# Altium PCB PCB1.PcbDoc
Units mm, origin at the board's own origin, x right, y up, seen from the top; angles counter-clockwise.
Board outline 85.78 x 46.61 mm, 2 copper layers (Top Layer, Bottom Layer); 29 components, 13 nets, 66 pads, 0 vias.
Unrouted connection lines stored in the file: 2.
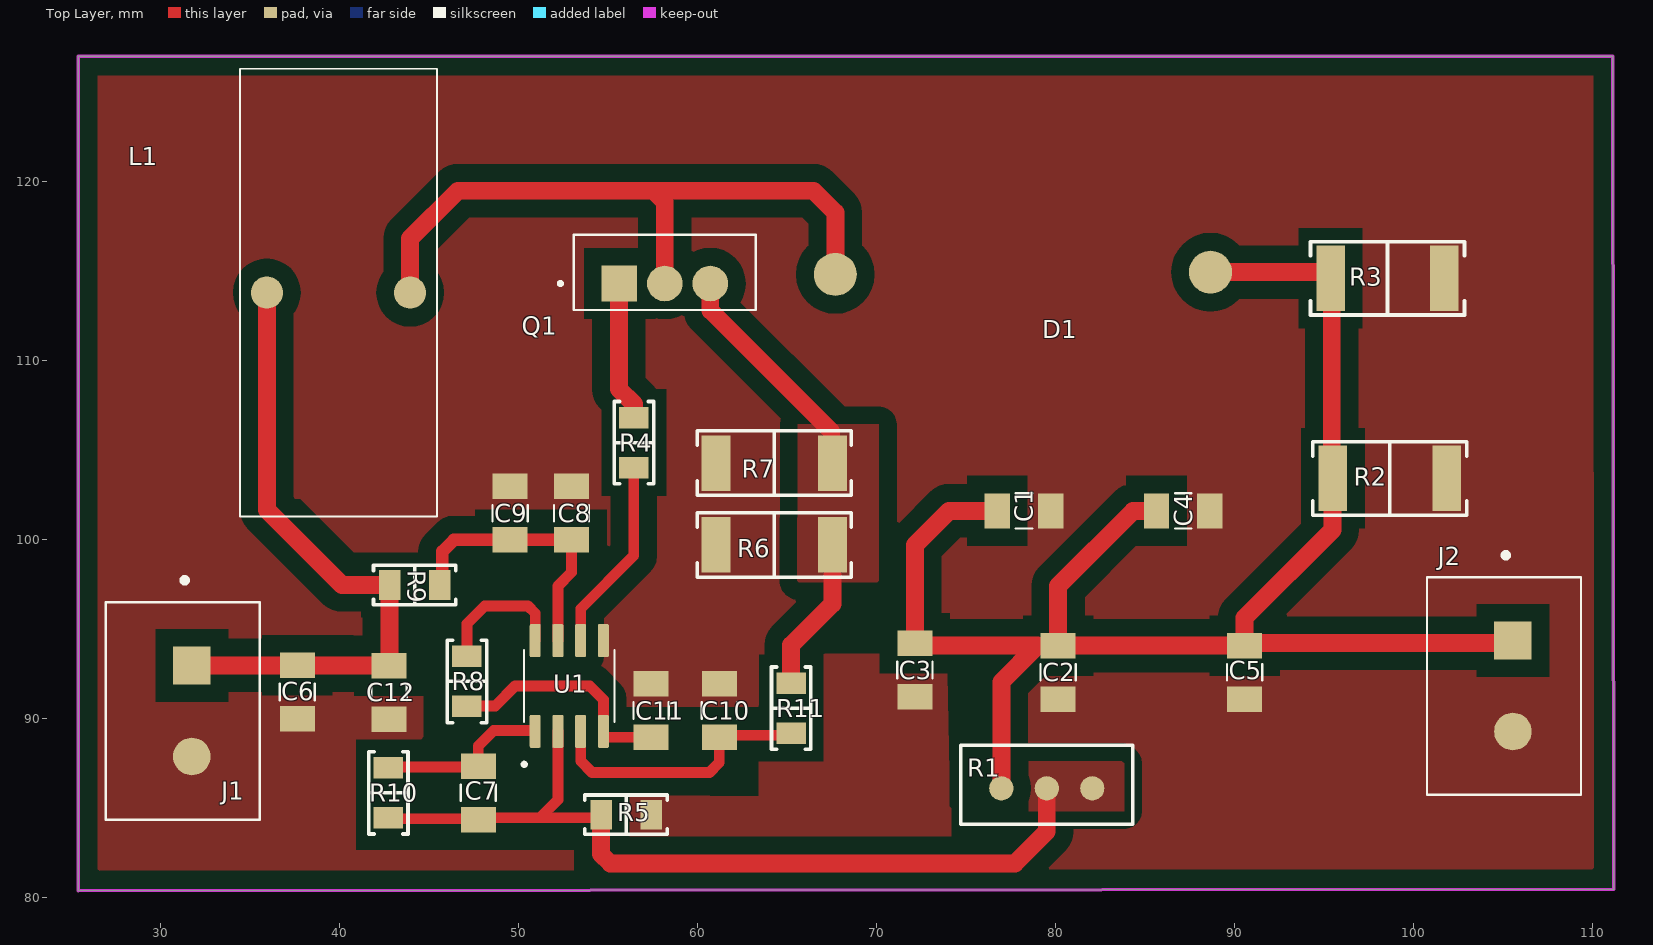
[diagram p0: Top Layer view]
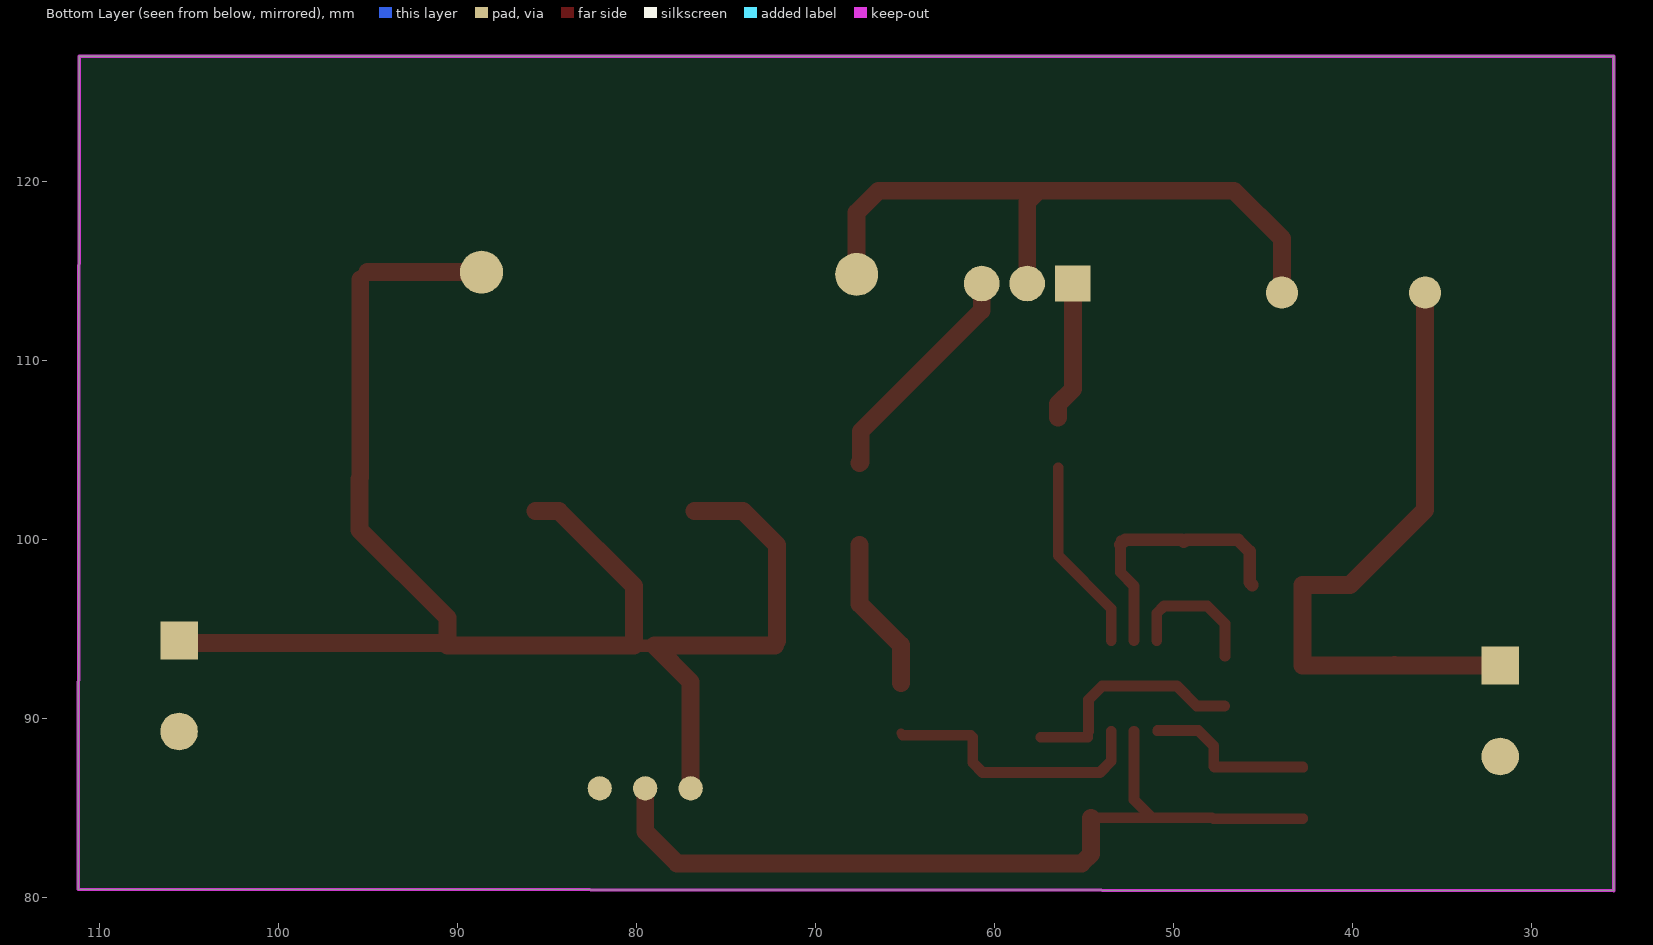
[diagram p1: Bottom Layer view, seen from below]
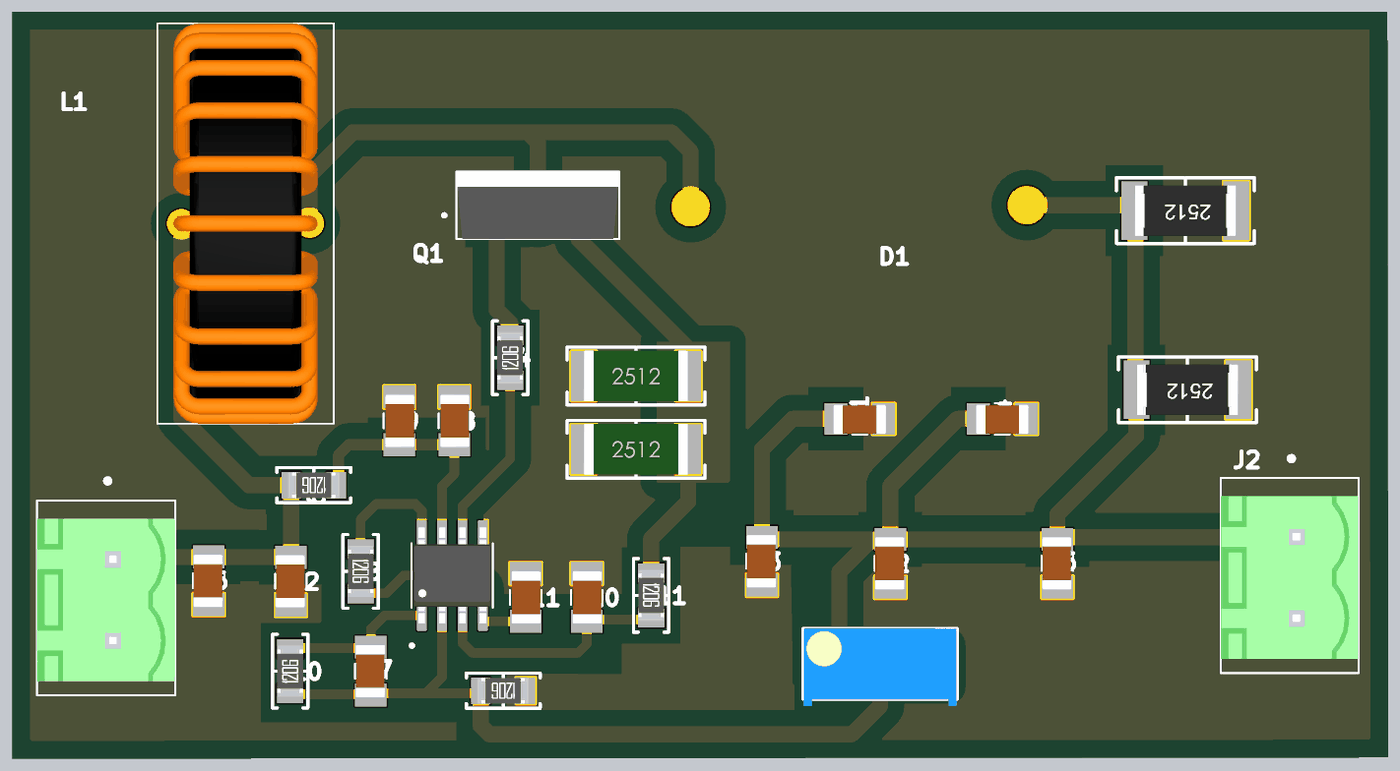
[diagram p2: 3D render of the assembled board from above, using the file's embedded part models]

## Layer stack, top to bottom
Top Solder: solder mask 0.0102, Solder Resist, Dk 3.5
Top Layer: signal copper 0.0356
Dielectric 1: dielectric 0.32, FR-4, Dk 4.8
Bottom Layer: signal copper 0.0356
Bottom Solder: solder mask 0.0102, Solder Resist, Dk 3.5

## Board outline
25.4,80.391 111.176,80.467 111.125,127 25.4,127

## Design rules (kind name [scope] priority, off if disabled: settings)
Clearance [All] p1: gap=1 ignorepadtopadclearanceinfootprint=FALSE except(0: Arc-Hole Track-Hole SMDPad-Hole THPad-Hole Via-Hole Fill-Hole Poly-Hole Region-Hole Text-Hole; 0.25: Arc-Via Track-Via SMDPad-Via THPad-Via Via-Via; 0.254: Arc-Arc Arc-Track Arc-SMDPad Arc-THPad Track-Track Track-SMDPad Track-THPad SMDPad-SMDPad SMDPad-THPad THPad-THPad)
PolygonConnect [All] p1: connectstyle=Direct reliefconductorwidth=0.254 reliefentries=4 polygonreliefangle="90 Angle" airgapwidth=0.254
RoutingVias [All] p1: holewidth=0.711 width=1.27 viastyle="Through Hole" minholewidth=0.711 minwidth=1.27 maxholewidth=0.711 maxwidth=1.27
SolderMaskExpansion [All] p1: expansion=0.102
Width [All] p1: maxlimit=1 minlimit=0.254 preferedwidth=0.7 bottomlayer_maxwidth=0.254 bottomlayer_prefwidth=0.254 minimp=50.000000 maximp=50.000000 favimp=50.000000
30 further rules are at their usual default settings.

## Classes and differential pairs
component class Sheet1: C1 C2 C3 C4 C5 C6 C7 C8 C9 C10 C11 C12 D1 L1 Q1 R1 R2 R3 R4 R5 R6 R7 R8 R9 R10 R11 U1

## Components (designator, comment, footprint, x,y, rotation, side; value= is the part's Value field where it differs from the comment)
C1 "100nF" C1206_2uF 78.232,101.6 r180 top
C2 "1000uF/50V" C1206_2uF 80.137,92.583 r90 top
C3 "1000uF/50V" C1206_2uF 72.136,92.71 r90 top
C4 "1000uF/50V" C1206_2uF 87.122,101.6 r180 top
C5 "1uF/50V" C1206_2uF 90.551,92.583 r90 top
C6 "470uF/50V" C1206_2uF 37.643,91.491 r90 top
C7 "1nF" C1206_2uF 47.752,85.852 r90 top
C8 "10uF" C1206_2uF 52.959,101.473 r270 top
C9 "10uF" C1206_2uF 49.53,101.473 r270 top
C10 "470pF" C1206_2uF 61.214,90.456 r270 top
C11 "1nF" C1206_2uF 57.404,90.456 r270 top
C12 "1uF/50V" C1206_2uF 42.77,91.465 r90 top
D1 "1N5822" 15SQ045 80.01,114.808 r180 top
J1 "con_5.08" 5.08_con_1 31.877,90.297 r270 top
J2 "con_5.08" 5.08_con_1 105.664,91.694 r270 top
L1 "100uH" 100uH_SMD 40.302,114.113 r0 top
Q1 "IRFZ44N" IRFZ44N 58.166,114.3 r0 top
R1 "100k_pot" pot_100k_1 79.375,86.233 r180 top
R2 "10k" R2512 98.679,103.378 r180 top
R3 "10k" R2512 98.552,114.554 r180 top
R4 "4.7R" 1206_Res 56.388,105.537 r90 top
R5 "1k" 1206_Res 55.88,84.582 r180 top
R6 "0.1R" 2512 64.237,99.644 r0 top
R7 "0.1R" 2512 64.237,104.216 r0 top
R8 "15k" 1206_Res 47.169,91.951 r270 top
R9 "10R" 1206_Res 44.069,97.409 r180 top
R10 "100k" 1206_Res 42.672,85.979 r90 top
R11 "1k" 1206_Res 65.278,90.456 r270 top
U1 "uc3843_SMD" uc3843_SOIC8 52.959,91.694 r90 top

## Footprints (in the part's own frame and the unit in brackets; to place one, negate y for a bottom-side part, rotate by r counter-clockwise, add the part's x,y. Pads: shape width x height; smd on the part's side, far side on the other; paste and mask are expansions set on the pad)
5.08_con_1 [mm]
  rect 2.1x2.1 all layers, no hole: 1(-2.667,-0.127)
  round 2.1 all layers, no hole: 2(2.413,-0.127)
  silkscreen extent -7.57,-4.93 5.95,3.67, body extent -5.08,-4.93 5.08,3.66, height 12
15SQ045 [mm]
  round 2.4 all layers, no hole: 1(-8.636,-0.127) 2(12.319,0)
100uH_SMD [mm]
  round 1.8 all layers, no hole: 1(-4.36,-0.321) 2(3.64,-0.321)
  silkscreen extent -5.86,-12.82 5.14,12.18, body extent -14.36,-3.7 5.64,3.05, height 5.8
1206_Res [mm]
  rect 1.2x1.65 smd: 1(-1.527,-0.052) 2(1.273,-0.052)
  silkscreen extent -2.43,-1.15 2.17,1.05, body extent -1.73,-0.85 1.47,0.75, height 0.6
2512 [mm]
  rect 1.6x3.1 smd: 1(-3.206,0.055) 2(3.294,0.055)
  silkscreen extent -4.26,-1.74 4.34,1.86, body extent -3.21,-1.52 3.29,1.63, height 0.6
C1206_2uF [mm]
  rect 1.42x1.96 smd: 1(-1.492,0) 2(1.492,0)
  silkscreen extent -0.46,-0.98 0.46,0.98, body extent -1.65,-0.89 1.65,0.96, height 1.6
IRFZ44N [mm]
  rect 1.995x1.995 / inner round 1.995 / far side rect 1.995x1.995 all layers, no hole: 1(-2.54,0)
  round 1.995 all layers, no hole: 2(0,0) 3(2.54,0)
  silkscreen extent -5.93,-1.48 5.08,2.72, body extent -5.08,-1.47 5.08,2.72, height 22.86
pot_100k_1 [mm]
  round 1.35 all layers, no hole: 1(-2.667,0.127) 2(-0.127,0.127) 3(2.413,0.127)
  silkscreen extent -4.93,-2.27 4.67,2.13, body extent -4.89,-2.29 4.64,2.54, height 11.56
R2512 [mm]
  rect 1.6x3.65 smd: 1(-3.154,-0.037) 2(3.196,-0.037)
  silkscreen extent -4.28,-2.09 4.32,2.01, body extent -3.13,-1.61 3.17,1.54, height 0.7
uc3843_SOIC8 [mm]
  rrect25% 1.84x0.61 smd: 1(-2.408,2.032) 2(-2.408,0.762) 3(-2.408,-0.508) 4(-2.408,-1.778) 5(2.662,-1.778) 6(2.662,-0.508) 7(2.662,0.762) 8(2.662,2.032)
  silkscreen extent -4.35,-2.4 2.13,2.74, body extent -2.87,-2.32 3.12,2.58, height 1.75

## Part data
C1 C2 C3 C4 C5 C6 C7 C8 C9 C10 C11 C12: library part C1206_2uf
D1: "Diode; Diode Type:Schottky; Repetitive Reverse Voltage Max, Vrrm:40V; Forward Current, If(AV):3A; Forward Surge Current Max, Ifsm:80A; Forward Voltage Max, VF:0.525V; Junction Temperature, Tj max:125°C ;RoHS Compliant: Yes"
Q1: "N-Channel 55 V 49A (Tc) 94W (Tc) Through Hole TO-220AB"
R2 R3: library part R2512_1W
R4 R5 R8 R9 R10 R11: library part 1206
R6 R7: library part 2512

## Nets (pads, with @x,y where several pads share a name; then routed paths per layer and width w, separated by ;. In a path a pad name is that pad's centre, name@x,y a point inside that pad or via, vN(x,y) a via of type N, cw(c..) or ccw(c..) an arc to the next point about the centre after c; other vN are vias at no path point)
GND: C1.1 C2.1 C3.1 C4.1 C5.1 C6.1 C8.1 C9.1 C10.1 C11.1 C12.1 J1.2 J2.2 R2.1 R3.1 R5.1 R6.1 R7.1 U1.5
NetC7_1: C7.1 R1.1 R1.2 R5.2 R10.1 U1.2 | length 47.6
  Top Layer w0.5: R10.1 R10.1@42.77,84.406 ; C7.1@47.706,84.406 C7.1 C7.1@47.854,84.462 ; R5.2@54.257,84.462 R5.2@54.428,84.633 ; R5.2@54.428,84.634 R5.2@54.607,84.455
  Top Layer w0.6: R10.1@42.77,84.406 C7.1@47.706,84.406 ; C7.1@47.854,84.462 51.188,84.462 ; U1.2 52.197,85.471 51.188,84.462 ; R5.2@54.257,84.462 51.188,84.462
  Top Layer w1: R5.2@54.607,84.455 54.607,82.426 55.118,81.915 77.724,81.915 79.502,83.693 R1.2
NetC7_2: C7.2 R10.2 U1.1 | length 9.7
  Top Layer w0.5: R10.2 R10.2@42.77,87.298 ; U1.1@50.881,89.332 U1.1
  Top Layer w0.6: R10.2@42.77,87.298 47.706,87.298 C7.2 47.752,88.468 48.616,89.332 U1.1@50.881,89.332
NetC8_2: C8.2 C9.2 R9.1 U1.7 | length 15.6
  Top Layer w0.5: C8.2@52.959,99.711 C8.2
  Top Layer w0.6: U1.7 52.197,97.409 52.959,98.171 C8.2@52.959,99.711
  Top Layer w0.7: R9.1 45.742,97.607 45.742,99.336 46.387,99.981 49.296,99.981 49.413,99.864 C9.2 52.689,99.981 C8.2@52.959,99.711
NetC10_2: C10.2 R11.2 U1.3 | length 15.4
  Top Layer w0.5: C10.2 C10.2@61.323,89.073 ; R11.2@65.116,89.073 R11.2
  Top Layer w0.6: U1.3 53.467,87.63 54.102,86.995 60.667,86.995 61.214,87.542 C10.2 ; C10.2@61.323,89.073 R11.2@65.116,89.073
NetC11_2: C11.2 R8.2 U1.4 | length 13.1
  Top Layer w0.5: R8.2 R8.2@47.148,90.709 ; U1.4 54.737,89.019 U1.4@54.792,88.964
  Top Layer w0.6: R8.2@47.148,90.709 48.692,90.709 49.804,91.821 53.975,91.821 54.737,91.059 U1.4 ; U1.4@54.792,88.964 C11.2
NetD1_2: D1.2 L1.2 Q1.2 | length 37.3
  Top Layer w1: L1.2 43.942,116.815 46.609,119.482 57.529,119.482 ; Q1.2 58.166,118.845 57.529,119.482 ; D1.2 67.691,118.262 66.472,119.482 57.529,119.482
NetQ1_1: Q1.1 R4.2 | length 7.8
  Top Layer w1: Q1.1 55.601,114.275 55.601,108.407 56.44,107.568 R4.2
NetQ1_3: Q1.3 R6.2 R7.2 R11.1 | length 21.7
  Top Layer w0.7: Q1.3 Q1.3@60.833,114.173
  Top Layer w1: Q1.3 60.706,112.801 67.462,106.045 67.462,104.339 R7.2 ; R11.1 65.226,94.106 67.531,96.41 R6.2
NetR4_1: R4.1 U1.6 | length 10.9
  Top Layer w0.6: U1.6 53.467,96.139 56.44,99.112 R4.1
NetR8_1: R8.1 U1.8 | length 7.7
  Top Layer w0.6: R8.1 47.117,95.301 48.108,96.291 50.521,96.291 50.927,95.885 U1.8
VCC: C6.2 C12.2 J1.1 L1.1 R9.2 | length 36.3
  Top Layer w1: J1.1 31.759,92.973 37.633,92.973 C6.2 37.655,92.97 42.757,92.97 C12.2 42.783,92.97 42.783,97.448 R9.2 40.131,97.461 35.942,101.65 L1.1
VOUT: C1.2 C2.2 C3.2 C4.2 C5.2 D1.1 J2.1 R1.3 R2.2 R3.2 | length 93.1
  Top Layer w0.7: C3.2 C3.2@72.263,94.075 ; C3.2@72.136,94.329 C3.2@72.2,94.266 ; 78.987,94.075 C2.2 ; R3.2@95.012,114.935 R3.2 R3.2@95.42,114.528 ; R2.2@95.42,103.479 R2.2 R2.2@95.46,103.392 ; J2.1@105.394,94.218 J2.1
  Top Layer w1: C3.2@72.136,94.329 72.136,99.695 74.041,101.6 C1.2 ; C3.2@72.263,94.075 78.987,94.075 76.962,92.05 R1.3 ; C4.2 84.328,101.6 80.137,97.409 C2.2 C5.2 90.551,95.631 95.46,100.54 R2.2@95.46,103.392 ; D1.1 R3.2@95.012,114.935 ; C5.2@90.694,94.218 J2.1@105.394,94.218 ; R2.2@95.42,103.479 R3.2@95.42,114.528

## Polygon pours and split planes (outlines as drawn)
GND on Top Layer (solid, remove dead copper, pour order 50): 25.4,127 111.125,127 111.176,126.949 111.176,80.467 25.476,80.467 25.4,80.391
NetQ1_3 on Top Layer (solid, remove dead copper, pour order 48): 65.583,104.775 65.583,106.426 70.129,106.426 70.129,97.561 70.104,97.536 70.028,97.612 65.557,97.612
no net on Top Layer "Top Layer-No Net" (solid, remove dead copper, pour order 40): 40.032,95.15
NetC7_1 on Top Layer "Top Layer-NetC7_1" (solid, remove dead copper, pour order 2): 78.486,87.63 78.486,84.836 83.82,84.836 83.82,87.503 83.693,87.63

## Keep-outs
Keep-Out Layer:
  the board outline again, w0.2

## Other copper
Top Layer:
  pour cut-out: 73.866,95.662
  pour cut-out: 81.788,95.758
  pour cut-out: 41.446,97.467